# EAGLE board board (EAGLE 6.4), part 1 of 2
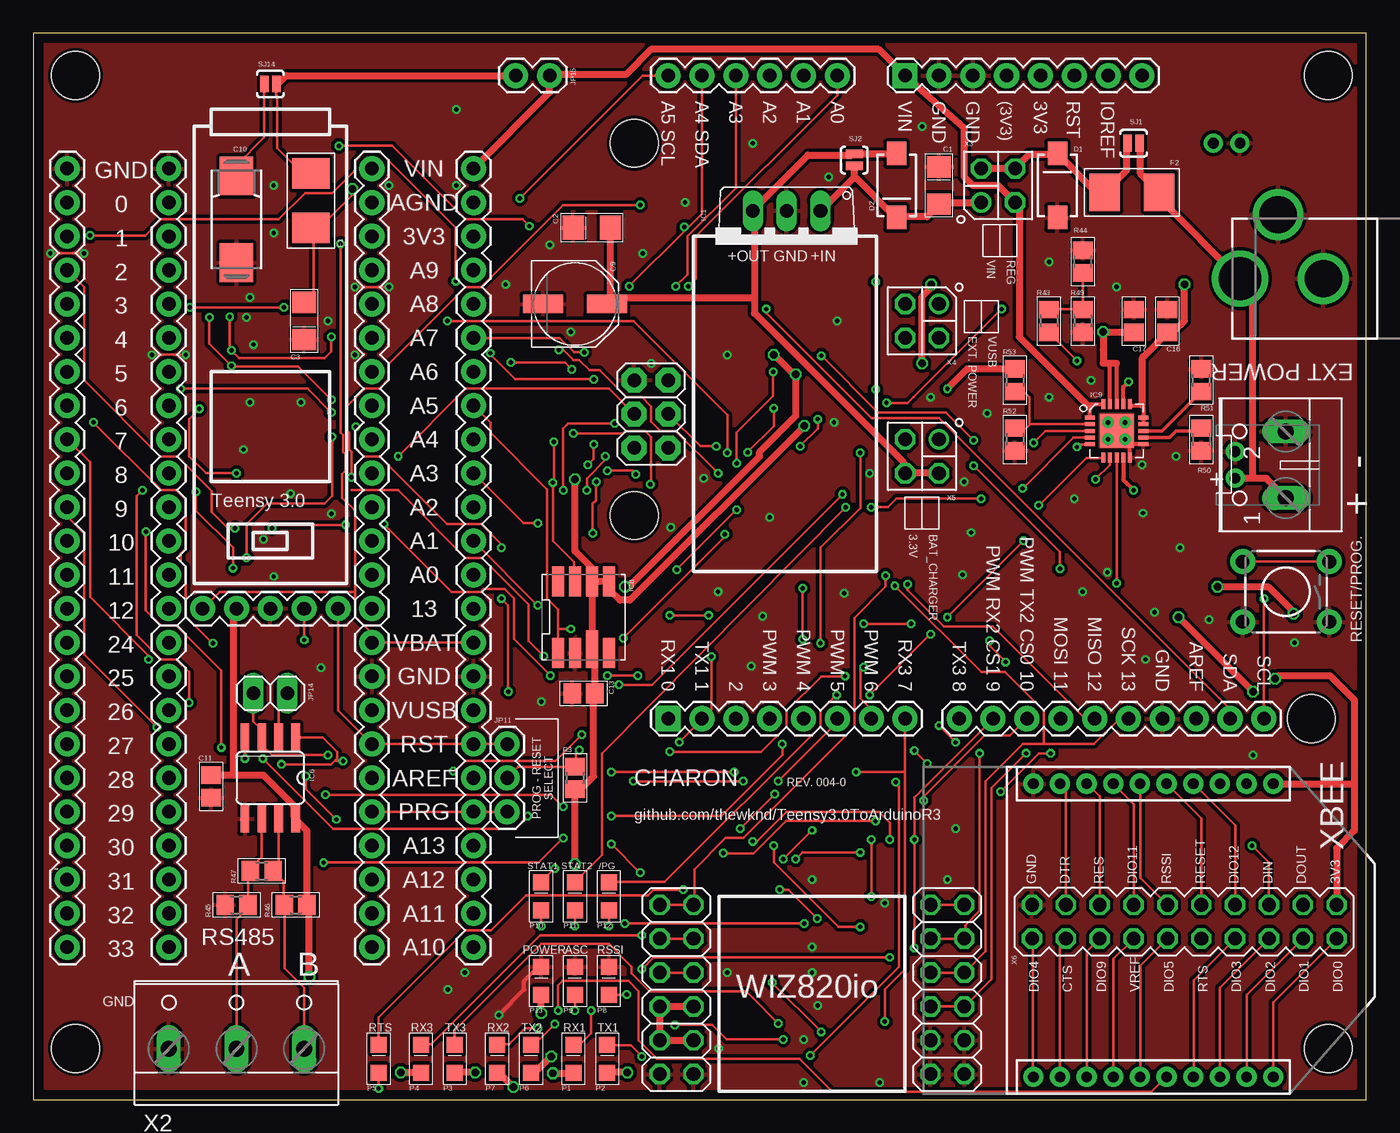
[diagram p0: board, top side]
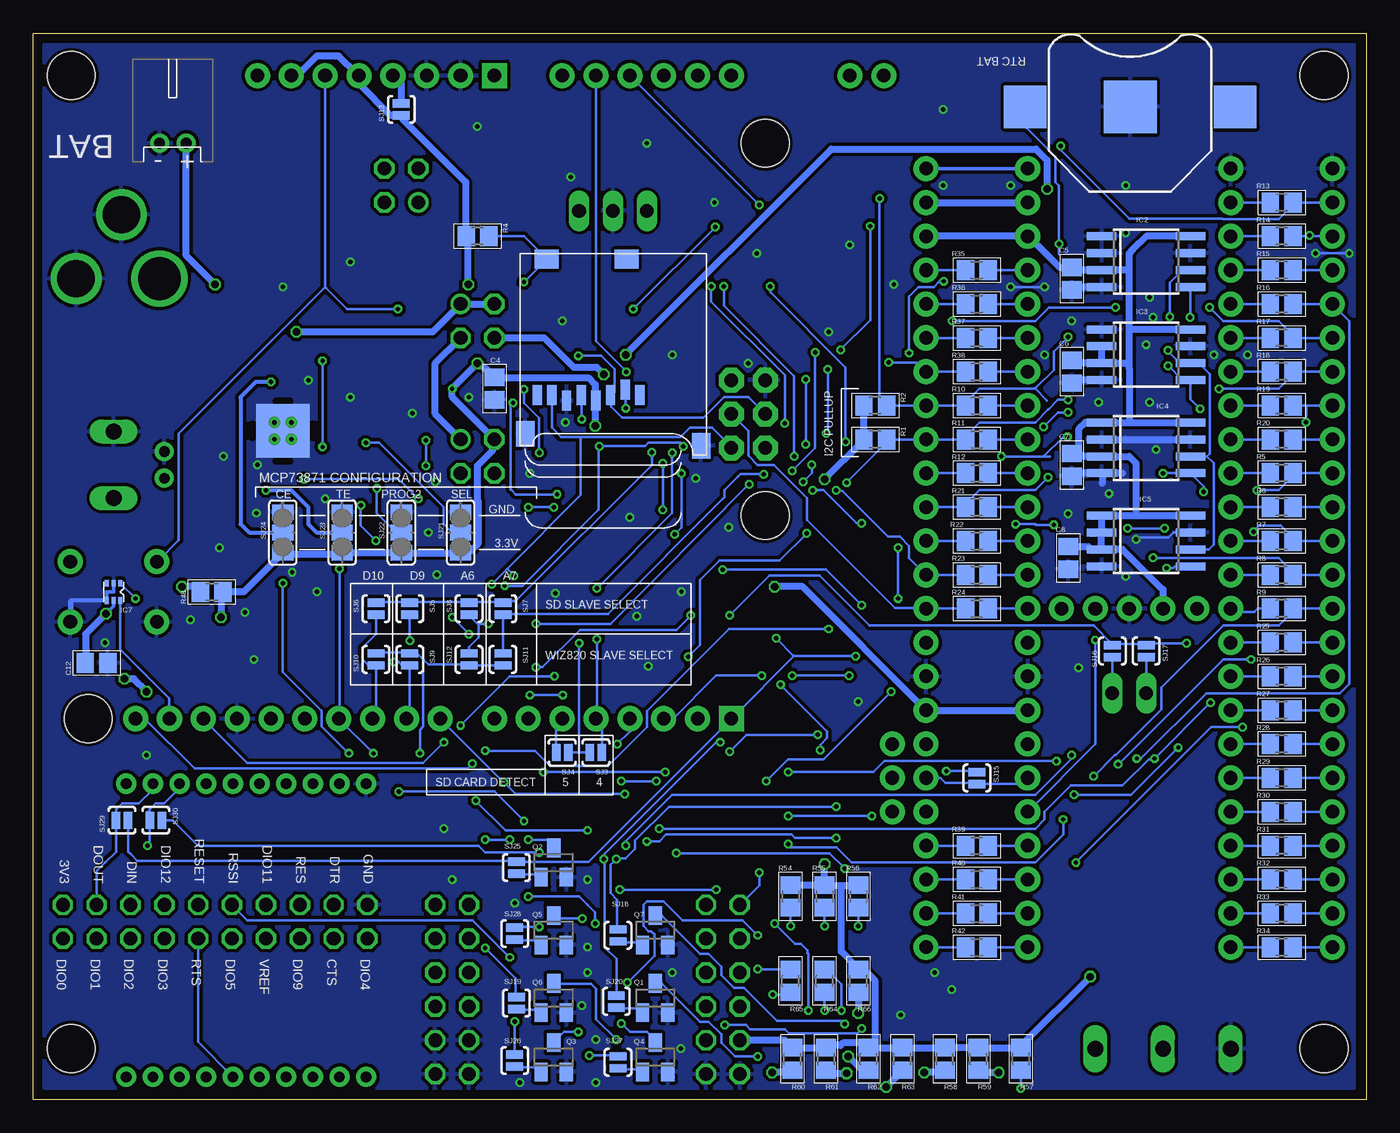
[diagram p1: board, bottom side, seen from below]

Size 100 x 80 mm. Coordinates in mm from the lower left corner, seen from the top.
Outline: 0,0 100,0 100,80 0,80 0,0
Copper layers (1*16): Top 0.035mm / dielectric 1.5mm / Bottom 0.035mm
Design rules "ITEADstudio_DRC": minimum track width 6mil, minimum drill 12mil, track to track 6mil, track to pad 6mil, pad to pad 6mil, via to via 6mil, smd to smd 0mil, copper to edge 10mil, drill to drill 10mil, minimum pad ring 10mil, minimum via ring 6mil, stop-mask expansion 2mil, vias tented up to drill 100mil, thermal gap 10mil
Net classes: 0 default: width 0.203 mm, drill 0.33 mm, clearance 0.229 mm; 1 POWER: width 0.203 mm, drill 0.33 mm, clearance 0.229 mm; 2 POWER2: width 0.254 mm, drill 0.305 mm, clearance 0.229 mm
Holes 3.6 mm at 95.89,28.57 45.09,43.81 45.09,71.75 97.16,3.83 3.15,76.83 3.15,3.83 97.16,76.83
tKeepout: area 94.3,74 to 100,79.7; area 94.3,1 to 100,6.7; area 0.3,1 to 6,6.7; area 0.3,74 to 6,79.7; area 42.2,68.9 to 47.9,74.6; area 42.2,41 to 47.9,46.7; area 93,25.7 to 98.7,31.4
bKeepout: area 0.3,74 to 6,79.7; area 94.3,74 to 100,79.7; area 94.3,1 to 100,6.7; area 0.3,1 to 6,6.7; area 42.2,68.9 to 47.9,74.6; area 42.2,41 to 47.9,46.7; area 93,25.7 to 98.7,31.4

## Footprints (pad centres in the part's own frame; a part is rotated, then mirrored left to right if it is on the bottom)
BATTCON_12MM = smd 3.962 x 3.962: GND 0,0 | smd 3.175 x 3.175: PWR@1 -7.874,0; PWR@2 7.874,0
3216C-POL = smd 1.6 x 1.8: + -1.4,0; - 1.4,0
0805C = smd 1.3 x 1.5: 1 -0.85,0; 2 0.85,0
PANASONIC_D = smd 3 x 1.4: + 2.4,0; - -2.4,0
085CS_1AR = smd 2.9 x 2.5: + 3.25,0; - -3.25,0
JST-PH-2-THM-RA = drill 0.8 pad 1.422: 1 1,0; 2 -1,0
DCJACK_2MM_PTH = drill 2.8: GND 0,7.35; GNDBREAK 4.8,10.75 | drill 3.2: PWR 0,13.6
SMA-DIODE-KIT = smd 1.77 x 1.47: A -2.4,0; C 2.4,0
1812STD = smd 2.286 x 2.794: + -2.046,0; - 2.046,0
TO220V = drill 1.016 long: 1 -2.54,-2.54; 2 0,-2.54; 3 2.54,-2.54
SOIC-8 = smd 0.6 x 2.2: 1 -1.905,-3.33; 2 -0.635,-3.33; 3 0.635,-3.33; 4 1.905,-3.33; 5 1.905,3.33; 6 0.635,3.33; 7 -0.635,3.33; 8 -1.905,3.33
SO08 = smd 0.66 x 2.032: 1 -1.905,-3.073; 2 -0.635,-3.073; 3 0.635,-3.073; 4 1.905,-3.073; 5 1.905,3.073; 6 0.635,3.073; 7 -0.635,3.073; 8 -1.905,3.073
SOT563 = smd 0.5 x 0.3: 1 -0.65,0.5; 2 -0.65,0; 3 -0.65,-0.5; 4 0.65,-0.5; 5 0.65,0; 6 0.65,0.5
MS5803 = smd 2.25 x 0.9: 1 -2.67,1.9; 2 -2.67,0.65; 4 -2.67,-1.9; 5 2.67,-1.9; 6 2.67,-0.65; 7 2.67,0.65; 8 2.67,1.9 | smd 2.8 x 0.9: 3 -2.395,-0.65
QFN-20 = smd 0.75 x 0.3: 1 -2,1; 2 -2,0.5; 3 -2,0; 4 -2,-0.5; 5 -2,-1; 11 2,-1; 12 2,-0.5; 13 2,0; 14 2,0.5; 15 2,1 | smd 0.3 x 0.75: 6 -1,-2; 7 -0.5,-2; 8 0,-2; 9 0.5,-2; 10 1,-2; 16 1,2; 17 0.5,2; 18 0,2; 19 -0.5,2; 20 -1,2 | smd 2.5 x 2.5: 21 0,0 | smd 4 x 4 bottom: 22 0,0 | drill 0.35 pad 0.7: P$1 -0.635,0.635; P$2 0.635,-0.635; P$3 -0.635,-0.635; P$4 0.635,0.635
1X14 = drill 1.016 pad 1.88: 1 0,0; 2 2.54,0; 3 5.08,0; 4 7.62,0; 5 10.16,0; 6 12.7,0; 7 15.24,0; 8 17.78,0; 9 20.32,0; 10 22.86,0; 11 25.4,0; 12 27.94,0; 13 30.48,0; 14 33.02,0
2X06 = drill 1.016 octagon: 1 -6.35,-1.27; 2 -6.35,1.27; 3 -3.81,-1.27; 4 -3.81,1.27; 5 -1.27,-1.27; 6 -1.27,1.27; 7 1.27,-1.27; 8 1.27,1.27; 9 3.81,-1.27; 10 3.81,1.27; 11 6.35,-1.27; 12 6.35,1.27
1X10 = drill 1.016 pad 1.88: 1 0,0; 2 2.54,0; 3 5.08,0; 4 7.62,0; 5 10.16,0; 6 12.7,0; 7 15.24,0; 8 17.78,0; 9 20.32,0; 10 22.86,0
1X08 = drill 1.016 pad 1.88 square: 1 0,0 | drill 1.016 pad 1.88: 2 2.54,0; 3 5.08,0; 4 7.62,0; 5 10.16,0; 6 12.7,0; 7 15.24,0; 8 17.78,0
1X06 = drill 1.016 pad 1.88: 1 0,0; 2 2.54,0; 3 5.08,0; 4 7.62,0; 5 10.16,0; 6 12.7,0
2X03 = drill 1.016 pad 1.88 octagon: 1 -2.54,-1.27; 2 -2.54,1.27; 3 0,-1.27; 4 0,1.27; 5 2.54,-1.27; 6 2.54,1.27
1X03 = drill 1.016 pad 1.88: 1 0,0; 2 2.54,0; 3 5.08,0
1X02 = drill 1.016 long: 1 -1.27,0; 2 1.27,0
1X02' = drill 1.016 pad 1.88: 1 0,0; 2 2.54,0
1X05 = drill 1.016 pad 1.88: 1 0,0; 2 2.54,0; 3 5.08,0; 4 7.62,0; 5 10.16,0
LED0805 = smd 1.2 x 1.2: A 0,-1.05; C 0,1.05
SOT23 = smd 1 x 1.4: 1 -0.95,-1.1; 2 0.95,-1.1; 3 0,1.1
R0805 = smd 1.3 x 1.5: 1 -0.85,0; 2 0.85,0
TACTILE-PTH = drill 1.016 pad 1.88: 1 -3.251,2.261; 2 3.251,2.261; 3 -3.251,-2.261; 4 3.251,-2.261
SJ_2S-NO = smd 0.635 x 1.27: 1 -0.45,0; 2 0.45,0
SJ_2 = smd 1.168 x 1.6: 1 -1.524,0; 2 0,0; 3 1.524,0
MICROSD = smd 0.7 x 1.5: 1 9,-10.64; 2 7.9,-10.24; 3 6.8,-10.64; 4 5.7,-11.04; 5 4.6,-10.64; 6 3.5,-11.04; 7 2.4,-10.64; 8 1.3,-10.64 | smd 1.8 x 1.4: CD1 2,-0.44; CD2 8,-0.44 | smd 1.4 x 1.9: MT1 0.4,-13.54; MT2 13.6,-14.44
XBEE-SILK = drill 0.8 pad 1.524: 1 -11,20; 2 -11,18; 3 -11,16; 4 -11,14; 5 -11,12; 6 -11,10; 7 -11,8; 8 -11,6; 9 -11,4; 10 -11,2; 11 11,2; 12 11,4; 13 11,6; 14 11,8; 15 11,10; 16 11,12; 17 11,14; 18 11,16; 19 11,18; 20 11,20
1X24 = drill 1.016 pad 1.88: 2 -26.67,0; 3 -24.13,0; 4 -21.59,0; 5 -19.05,0; 6 -16.51,0; 7 -13.97,0; 8 -11.43,0; 9 -8.89,0; 10 -6.35,0; 11 -3.81,0; 12 -1.27,0; 13 1.27,0; 14 3.81,0; 15 6.35,0; 16 8.89,0; 17 11.43,0; 18 13.97,0; 19 16.51,0; 20 19.05,0; 21 21.59,0; 22 24.13,0; 23 26.67,0; 24 29.21,0; 25 31.75,0
W237-102 = drill 1.194 long: 1 -2.5,-1.27; 2 2.5,-1.27
W237-133 = drill 1.194 long: 1 -5.08,-0.635; 2 0,-0.635; 3 5.08,-0.635
HEADER-PTH-2X2 = drill 1.016: 1 1.27,-1.27 | drill 1.016 octagon: 2 -1.27,-1.27; 3 1.27,1.27; 4 -1.27,1.27
HEADER-PTH-2X10 = drill 1.016 octagon: 1 -10.16,-1.27; 2 -10.16,1.27; 3 -7.62,-1.27; 4 -7.62,1.27; 5 -5.08,-1.27; 6 -5.08,1.27; 7 -2.54,-1.27; 8 -2.54,1.27; 9 0,-1.27; 10 0,1.27; 11 2.54,-1.27; 12 2.54,1.27; 13 5.08,-1.27; 14 5.08,1.27; 15 7.62,-1.27; 16 7.62,1.27; 17 10.16,-1.27; 18 10.16,1.27; 19 12.7,-1.27; 20 12.7,1.27

## Placement (x,y rotation side)
BAT1  [BATTCON_12MM]  17.7,74.48 0 bottom
C1  CAPACITOR_POL-3216-POL  [3216C-POL]  67.94,68.58 90 top
C2  CAPACITOR_POL-3216-POL  [3216C-POL]  41.91,65.41 180 top
C3  CAPACITOR_POL-3216-POL  [3216C-POL]  20.32,58.42 270 top
C4  [0805C]  65.41,53.34 270 bottom
C5  [0805C]  22.1,61.59 270 bottom
C6  [0805C]  22.1,54.61 270 bottom
C7  [0805C]  22.1,47.62 270 bottom
C8  [0805C]  22.35,40.64 270 bottom
C9  [PANASONIC_D]  40.64,59.69 0 top
C10  [085CS_1AR]  15.24,66.04 90 top
C11  [0805C]  13.34,23.5 270 top
C12  [0805C]  95.25,32.77 0 bottom
C13  [0805C]  41.27,30.48 180 top
C16  [0805C]  85.09,58.42 90 top
C17  [0805C]  82.55,58.42 90 top
CN1  [JST-PH-2-THM-RA]  90.17,47.62 270 top
CN2  [DCJACK_2MM_PTH]  104.14,61.59 90 top
CN3  [JST-PH-2-THM-RA]  89.53,71.75 0 bottom
D1  [SMA-DIODE-KIT]  76.83,68.58 90 top
D2  [SMA-DIODE-KIT]  64.77,68.58 270 top
F1  FUSE1812  [1812STD]  20.83,67.44 90 top
F2  FUSE1812  [1812STD]  82.42,68.07 180 top
IC1  78XX compatible  [TO220V]  56.52,64.14 180 top
IC2  24AA1025SM  [SOIC-8]  16.51,62.87 270 bottom
IC3  24AA1025SM  [SOIC-8]  16.51,55.88 270 bottom
IC4  24AA1025SM  [SOIC-8]  16.51,48.9 270 bottom
IC5  24AA1025SM  [SOIC-8]  16.51,41.91 270 bottom
IC6  LTC2862  [SO08]  17.78,24.13 180 top
IC7  TMP102  [SOT563]  93.98,38.1 270 bottom
IC8  MS5803-01BA  [MS5803]  41.27,36.2 90 top
IC9  MCP73871  [QFN-20]  81.28,50.16 0 top
JP1  M14  [1X14]  10.16,36.83 90 top
JP2  [2X06]  48.26,8.26 90 top
JP3  M14  [1X14]  25.4,36.83 90 top
JP4  [2X06]  68.58,8.26 90 top
JP5  M10"  [1X10]  69.47,28.57 0 top
JP6  [1X08]  65.41,76.83 0 top
JP7  [1X08]  47.62,28.57 0 top
JP8  [1X06]  47.62,76.83 0 top
JP9  SPI  [2X03]  46.35,51.44 90 top
JP11  [1X03]  35.56,26.67 270 top
JP14  [1X02]  17.78,30.48 0 top
JP15  [1X02']  38.73,76.83 180 top
JP16  [1X05]  22.86,36.83 180 top
JP17  M10"  [1X10]  10.16,11.43 90 top
JP18  M10"  [1X10]  25.4,11.43 90 top
P1  LED  [LED0805]  40.51,3.05 0 top
P2  LED  [LED0805]  43.05,3.05 0 top
P3  LED  [LED0805]  31.62,3.05 0 top
P4  LED  [LED0805]  29.08,3.05 0 top
P5  LED  [LED0805]  25.91,3.05 0 top
P6  LED  [LED0805]  37.34,3.05 0 top
P7  LED  [LED0805]  34.8,3.05 0 top
P8  LED  [LED0805]  43.18,8.89 0 top
P9  LED  [LED0805]  40.64,8.89 0 top
P10  [LED0805]  38.1,15.24 0 top
P11  [LED0805]  40.64,15.24 0 top
P12  [LED0805]  43.18,15.24 0 top
P13  LED  [LED0805]  38.1,8.89 0 top
Q1  2N7002  [SOT23]  53.34,7.62 0 bottom
Q2  2N7002  [SOT23]  60.96,17.78 0 bottom
Q3  2N7002  [SOT23]  60.96,3.17 0 bottom
Q4  2N7002  [SOT23]  53.34,3.17 0 bottom
Q5  2N7002  [SOT23]  60.96,12.7 0 bottom
Q6  2N7002  [SOT23]  60.96,7.62 0 bottom
Q7  2N7002  [SOT23]  53.34,12.7 0 bottom
R1  [R0805]  36.83,49.53 180 bottom
R2  [R0805]  36.83,52.07 180 bottom
R3  [R0805]  40.64,24.13 270 top
R4  R4  [R0805]  66.67,64.77 180 bottom
R5  [R0805]  6.35,46.99 180 bottom
R6  [R0805]  6.35,44.45 180 bottom
R7  [R0805]  6.35,41.91 180 bottom
R8  [R0805]  6.35,39.37 180 bottom
R9  [R0805]  6.35,36.83 180 bottom
R10  [R0805]  29.21,52.07 0 bottom
R11  [R0805]  29.21,49.53 0 bottom
R12  [R0805]  29.21,46.99 0 bottom
R13  [R0805]  6.35,67.31 180 bottom
R14  [R0805]  6.35,64.77 180 bottom
R15  [R0805]  6.35,62.23 180 bottom
R16  [R0805]  6.35,59.69 180 bottom
R17  [R0805]  6.35,57.15 180 bottom
R18  [R0805]  6.35,54.61 180 bottom
R19  [R0805]  6.35,52.07 180 bottom
R20  [R0805]  6.35,49.53 180 bottom
R21  [R0805]  29.21,44.45 0 bottom
R22  [R0805]  29.21,41.91 0 bottom
R23  [R0805]  29.21,39.37 0 bottom
R24  [R0805]  29.21,36.83 0 bottom
R25  [R0805]  6.35,34.29 180 bottom
R26  [R0805]  6.35,31.75 180 bottom
R27  [R0805]  6.35,29.21 180 bottom
R28  [R0805]  6.35,26.67 180 bottom
R29  [R0805]  6.35,24.13 180 bottom
R30  [R0805]  6.35,21.59 180 bottom
R31  [R0805]  6.35,19.05 180 bottom
R32  [R0805]  6.35,16.51 180 bottom
R33  [R0805]  6.35,13.97 180 bottom
R34  [R0805]  6.35,11.43 180 bottom
R35  [R0805]  29.21,62.23 0 bottom
R36  [R0805]  29.21,59.69 0 bottom
R37  [R0805]  29.21,57.15 0 bottom
R38  [R0805]  29.21,54.61 0 bottom
R39  [R0805]  29.21,19.05 0 bottom
R40  [R0805]  29.21,16.51 0 bottom
R41  [R0805]  29.21,13.97 0 bottom
R42  [R0805]  29.21,11.43 0 bottom
R43  [R0805]  76.2,58.42 270 top
R44  [R0805]  78.74,62.87 90 top
R45  [R0805]  15.24,14.61 0 top
R46  [R0805]  19.68,14.61 0 top
R47  [R0805]  17.14,17.14 0 top
R48  [R0805]  86.61,38.1 0 bottom
R49  [R0805]  78.74,58.42 270 top
R50  [R0805]  87.63,49.53 270 top
R51  [R0805]  87.63,53.98 90 top
R52  RESISTOR  [R0805]  73.66,49.53 270 top
R53  [R0805]  73.66,53.98 270 top
R54  [R0805]  43.18,15.24 270 bottom
R55  [R0805]  40.64,15.24 270 bottom
R56  [R0805]  38.1,15.24 270 bottom
R57  RESISTOR  [R0805]  25.91,3.05 90 bottom
R58  RESISTOR  [R0805]  31.62,3.05 90 bottom
R59  RESISTOR  [R0805]  29.08,3.05 90 bottom
R60  RESISTOR  [R0805]  43.05,3.05 90 bottom
R61  RESISTOR  [R0805]  40.51,3.05 90 bottom
R62  RESISTOR  [R0805]  37.34,3.05 90 bottom
R63  RESISTOR  [R0805]  34.8,3.05 90 bottom
R64  [R0805]  40.64,8.89 90 bottom
R65  [R0805]  43.18,8.89 90 bottom
R66  RESISTOR  [R0805]  38.1,8.89 90 bottom
S1  [TACTILE-PTH]  93.98,38.1 180 top
SJ1  [SJ_2S-NO]  82.55,71.75 0 top
SJ2  [SJ_2S-NO]  61.59,70.48 270 top
SJ3  [SJ_2S-NO]  57.78,26.04 0 bottom
SJ4  [SJ_2S-NO]  60.33,26.04 180 bottom
SJ5  [SJ_2S-NO]  71.75,36.83 270 bottom
SJ6  [SJ_2S-NO]  74.3,36.83 270 bottom
SJ7  [SJ_2S-NO]  64.77,36.83 270 bottom
SJ8  [SJ_2S-NO]  67.31,36.83 270 bottom
SJ9  [SJ_2S-NO]  71.75,33.02 270 bottom
SJ10  [SJ_2S-NO]  74.3,33.02 270 bottom
SJ11  [SJ_2S-NO]  64.77,33.02 90 bottom
SJ12  [SJ_2S-NO]  67.31,33.02 90 bottom
SJ13  [SJ_2S-NO]  72.39,74.3 90 bottom
SJ14  [SJ_2S-NO]  17.78,76.2 180 top
SJ15  [SJ_2S-NO]  29.21,24.13 270 bottom
SJ16  [SJ_2S-NO]  19.05,33.66 270 bottom
SJ17  [SJ_2S-NO]  16.51,33.66 270 bottom
SJ18  [SJ_2S-NO]  56.13,12.32 270 bottom
SJ19  [SJ_2S-NO]  63.75,7.24 270 bottom
SJ20  [SJ_2S-NO]  56.26,7.37 90 bottom
SJ21  [SJ_2]  67.94,42.55 270 bottom
SJ22  [SJ_2]  72.39,42.55 270 bottom
SJ23  [SJ_2]  76.83,42.55 270 bottom
SJ24  [SJ_2]  81.28,42.55 270 bottom
SJ25  [SJ_2S-NO]  63.75,17.4 270 bottom
SJ26  [SJ_2S-NO]  63.88,2.92 90 bottom
SJ27  [SJ_2S-NO]  56.13,2.79 270 bottom
SJ28  SOLDERJUMPERNO  [SJ_2S-NO]  63.88,12.45 90 bottom
SJ29  [SJ_2S-NO]  93.34,20.95 180 bottom
SJ30  [SJ_2S-NO]  90.81,20.95 180 bottom
U1  MICROSD  [MICROSD]  63.5,63.5 0 bottom
U$1  XBEE-1B2  [XBEE-SILK]  73.03,12.7 270 top
U$3  M24  [1X24]  2.54,38.1 90 top
U$4  M24  [1X24]  33.02,38.1 90 top
X1  [W237-102]  92.71,47.62 90 top
X2  [W237-133]  15.24,4.45 0 top
X3  [HEADER-PTH-2X2]  72.39,68.58 270 top
X4  [HEADER-PTH-2X2]  66.67,58.42 90 top
X5  [HEADER-PTH-2X2]  66.67,48.26 90 top
X6  HEADER-2X10SLK  [HEADER-PTH-2X10]  87.63,13.34 180 top

## Library data of the parts
BAT1 S1 = SparkFun-Electromechanical
C1-C8 C11-C13 C16 C17 F1 F2 IC2-IC5 IC7-IC9 P1-P13 R1-R66 X3-X6 = thewknd
C9 = resistor
C10 = rcl
CN1-CN3 Q1-Q7 U1 = adafruit
D1 D2 = SparkFun-DiscreteSemi
IC1 = linear
IC6 = maxim; MPN: MAX3468ESA+T; OC_FARNELL: unknown; OC_NEWARK: 76K6724
JP1 JP3 JP5-JP9 JP11 JP15-JP18 U$3 U$4 = SparkFun-Connectors
JP2 JP4 JP14 = pinhead
SJ1-SJ30 = SparkFun-Passives
U$1 = SparkFun-RF
X1 = con-wago-500; MPN: 237-102; OC_FARNELL: unknown; OC_NEWARK: 70K9898
X2 = con-wago-508; OC_FARNELL: unknown; OC_NEWARK: unknown

## Nets
3.3V [POWER]: C4.1 C5.1 C6.1 C7.1 C8.1 C11.1 C13.1 IC2.3 IC2.8 IC3.2 IC3.3 IC3.8 IC4.1 IC4.3 IC4.8 IC5.1 IC5.2 IC5.3 IC5.8 IC6.8 IC8.3 IC8.5 IC8.6 JP2.3 JP2.4 JP2.5 JP2.6 JP3.12 JP6.5 JP6.7 JP16.4 R1.2 R2.2 R3.2 R4.2 R46.2 R48.2 R53.1 R54.1 R55.1 R56.1 R57.2 R58.2 R59.2 R60.2 R61.2 R62.2 R63.2 R66.2 SJ13.1 SJ21.3 SJ22.3 SJ23.3 SJ24.3 U1.4 U$1.1 U$4.23 X5.3 X6.1
5V [POWER]: JP6.4 SJ13.2
/PG: IC9.6 P12.C
A0: JP8.6 R23.1 U$4.13
A1: JP8.5 R22.1 U$4.14
A2: JP8.4 R21.1 U$4.15
A3: JP8.3 R12.1 U$4.16
A4: IC2.5 IC3.5 IC4.5 IC5.5 IC7.6 IC8.7 JP5.9 JP8.2 R1.1 R11.1 U$4.17
A5: IC2.6 IC3.6 IC4.6 IC5.6 IC7.1 IC8.1 JP5.10 JP8.1 R2.1 R10.1 U$4.18
A6: R38.1 SJ8.2 SJ12.2 U$4.19
A7: R37.1 SJ7.2 SJ11.2 U$4.20
A8: R36.1 U$4.21
A9: R35.1 U$4.22
A10: R42.1 U$4.2
A11: R41.1 U$4.3
A12: R40.1 U$4.4
A13: R39.1 U$4.5
AGND [POWER]: JP3.13 U$4.24
AREF: JP18.6 SJ15.2 U$4.7
BAT_CHARGER [POWER]: C17.1 IC9.18 IC9.19 X4.1 X4.3
CE: IC9.17 SJ24.2
D0: JP7.1 R13.1 SJ25.1 SJ29.1 U$3.24
D1: JP7.2 R14.1 SJ20.2 SJ30.1 U$3.23
D2: JP7.3 R15.1 U$3.22
D3: JP7.4 R16.1 U$3.21
D4: JP7.5 R17.1 SJ3.2 U$3.20
D5: JP7.6 R18.1 SJ4.2 U$3.19
D6: JP7.7 R19.1 SJ16.1 SJ17.1 U$3.18
D7: IC6.1 JP7.8 R20.1 SJ26.2 U$3.17
D8: IC6.4 JP5.1 R5.1 SJ27.1 U$3.16
D9: JP5.2 R6.1 SJ5.2 SJ9.2 SJ19.1 U$3.15
D10: JP5.3 R7.1 SJ6.2 SJ10.2 SJ18.1 U$3.14
D11: JP4.5 JP4.6 JP5.4 JP9.4 R8.1 U1.3 U$3.13
D12: JP2.11 JP2.12 JP5.5 JP9.1 R9.1 U1.7 U$3.12
D13: JP4.7 JP4.8 JP5.6 JP9.3 R24.1 U1.5 U$4.12
D24: R25.1 U$3.11
D25: R26.1 U$3.10
D26: R27.1 U$3.9
D27: R28.1 U$3.8
D28: R29.1 U$3.7
D29: R30.1 U$3.6
D30: R31.1 U$3.5
D31: R32.1 U$3.4
D32: R33.1 U$3.3
D33: R34.1 U$3.2
DIO0: U$1.20 X6.2
DIO1: U$1.19 X6.4
DIO2: U$1.18 X6.6
DIO3: U$1.17 X6.8
DIO4: U$1.11 X6.20
DIO5: U$1.15 X6.12
DIO9: U$1.13 X6.16
DIO11: U$1.7 X6.13
DIO12: U$1.4 X6.7
EXT_POWER [POWER]: CN1.1 CN2.PWR F2.+ SJ1.2 X1.1
EXT_RESET: JP6.6 JP11.2 R3.1 S1.3 S1.4
GND [POWER]: BAT1.GND C1.- C2.- C3.- C4.2 C5.2 C6.2 C7.2 C8.2 C9.- C10.- C11.2 C12.2 C13.2 C16.2 C17.2 CN1.2 CN2.GND CN2.GNDBREAK CN3.2 D1.A IC1.2 IC2.1 IC2.2 IC2.4 IC2.7 IC3.1 IC3.4 IC3.7 IC4.2 IC4.4 IC4.7 IC5.4 IC5.7 IC6.5 IC7.2 IC7.4 IC8.2 IC9.10 IC9.11 IC9.21 IC9.22 IC9.P$1 IC9.P$2 IC9.P$3 IC9.P$4 JP1.14 JP2.1 JP2.2 JP4.1 JP4.2 JP4.3 JP4.4 JP5.7 JP6.2 JP6.3 JP9.6 JP16.3 JP18.9 P8.C P9.C P13.C Q1.2 Q2.2 Q3.2 Q4.2 Q5.2 Q6.2 Q7.2 R44.2 R45.1 R49.2 R50.2 R51.2 R52.2 S1.1 S1.2 SJ21.1 SJ22.1 SJ23.1 SJ24.1 U1.6 U1.MT1 U1.MT2 U$1.10 U$3.25 U$4.10 X1.2 X2.1 X6.19
N$1 [POWER]: D1.C F2.- SJ1.1 X3.2 X3.4
N$2 [POWER]: F1.- JP15.2 SJ14.1
N$3 [POWER]: C1.+ D2.C IC1.1 SJ2.2 X3.1
N$5: JP1.5 R5.2
N$6: JP1.4 R6.2
N$7: JP1.3 R7.2
N$8: JP1.2 R8.2
N$9: JP1.1 R9.2
N$10: JP3.7 R10.2
N$11: JP3.6 R11.2
N$12: JP3.5 R12.2
N$13: JP1.13 R13.2
N$14: JP1.12 R14.2
N$15: JP1.11 R15.2
N$16: JP1.10 R16.2
N$17: JP1.9 R17.2
N$18: JP1.8 R18.2
N$19: JP1.7 R19.2
N$20: JP1.6 R20.2
N$21: JP3.4 R21.2
N$22: JP3.3 R22.2
N$23: JP3.2 R23.2
N$24: JP3.1 R24.2
N$25: JP17.10 R25.2
N$26: JP17.9 R26.2
N$27: JP17.8 R27.2
N$28: JP17.7 R28.2
N$29: JP17.6 R29.2
N$30: JP17.5 R30.2
N$31: JP17.4 R31.2
N$32: JP17.3 R32.2
N$33: JP17.2 R33.2
N$34: JP17.1 R34.2
N$35: JP3.11 R35.2
N$36: JP3.10 R36.2
N$37: JP3.9 R37.2
N$38: JP3.8 R38.2
N$39: JP18.4 R39.2
N$40: JP18.3 R40.2
N$41: JP18.2 R41.2
N$42: JP18.1 R42.2
N$43: IC6.2 JP14.2 SJ16.2
N$44: IC6.3 JP14.1 SJ17.2 SJ28.2
N$45: P5.C Q5.3
N$46: P5.A R57.1
N$47 [POWER]: P4.A R59.1
N$48 [POWER]: P3.A R58.1
N$49: P3.C Q4.3
N$50: P4.C Q3.3
N$51 [POWER]: P1.A R61.1
N$52: JP4.9 JP4.10 SJ9.1 SJ10.1 SJ11.1 SJ12.1
N$53: JP4.11 JP4.12
N$54 [POWER]: P2.A R60.1
N$55: P1.C Q2.3
N$56: P2.C Q1.3
N$57: JP2.7 JP2.8
N$58: JP2.9 JP2.10
N$59 [POWER]: P7.A R63.1
N$60 [POWER]: P6.A R62.1
N$61: P6.C Q7.3
N$62: P7.C Q6.3
N$63: JP5.8 SJ15.1
N$64: Q7.1 SJ18.2
N$65 [POWER]: C10.+ SJ14.2
N$66: Q6.1 SJ19.2
N$67: Q1.1 SJ20.1
N$68: Q2.1 SJ25.2
N$69: Q5.1 SJ28.1
N$70: Q3.1 SJ26.1
N$71: Q4.1 SJ27.2
N$72: P8.A R65.1
N$73: P9.A R64.1
N$74 [POWER]: P13.A R66.1
N$100 [POWER]: C16.1 CN3.1 IC9.14 IC9.15 IC9.16
N$103: R43.1 R44.1 R49.1
N$104: IC9.5 R43.2
N$105: IC9.12 R50.1
N$106: IC9.13 R51.1
N$107: IC9.2 R52.1 R53.2
N$109 [POWER]: C2.+ C9.+ D2.A IC1.3 SJ2.1 X5.2 X5.4
N$110 [POWER]: X4.2 X5.1
N$111: P12.A R54.2
N$112: P11.A R55.2
N$113: P10.A R56.2
NIC: R4.1 SJ3.1 SJ4.1 U1.CD1
PROG: JP11.3 JP16.2 JP18.5 U$4.6
PROG2: IC9.4 SJ22.2
QW: SJ5.1 SJ6.1 SJ7.1 SJ8.1 U1.2
RESET: JP11.1 JP16.1 JP18.7 U$4.8
RS485A: IC6.6 R45.2 R47.1 X2.2
RS485B: IC6.7 R46.1 R47.2 X2.3
SEL: IC9.3 SJ21.2
STAT1: IC9.8 P10.C
STAT2: IC9.7 P11.C
TE: IC9.9 SJ23.2
VBAT: BAT1.PWR@1 JP16.5 JP18.10 U$4.11
VCC [POWER]: C12.1 IC7.5 R48.1
VIN [POWER2]: IC9.1 IC9.20 JP3.14 JP6.1 JP15.1 U$4.25 X3.3
VUSB [POWER]: C3.+ F1.+ JP18.8 U$4.9 X4.4
XBEE_CTS: U$1.12 X6.18
XBEE_DIN: SJ30.2 U$1.3 X6.5
XBEE_DOUT: SJ29.2 U$1.2 X6.3
XBEE_DTR: U$1.9 X6.17
XBEE_RES1: U$1.8 X6.15
XBEE_RSSI: R65.2 U$1.6 X6.11
XBEE_RST: U$1.5 X6.9
XBEE_RTS: R64.2 U$1.16 X6.10
XBEE_VREF: U$1.14 X6.14